# Altium PCB 8CH_RELAY_CARD.PcbDoc
Units mm, origin at the board's own origin, x right, y up, seen from the top; angles counter-clockwise.
Board outline 140 x 72 mm, 2 copper layers (Top Layer, Bottom Layer); 39 components, 52 nets, 134 pads, 0 vias.
Unrouted connection lines stored in the file: 2.
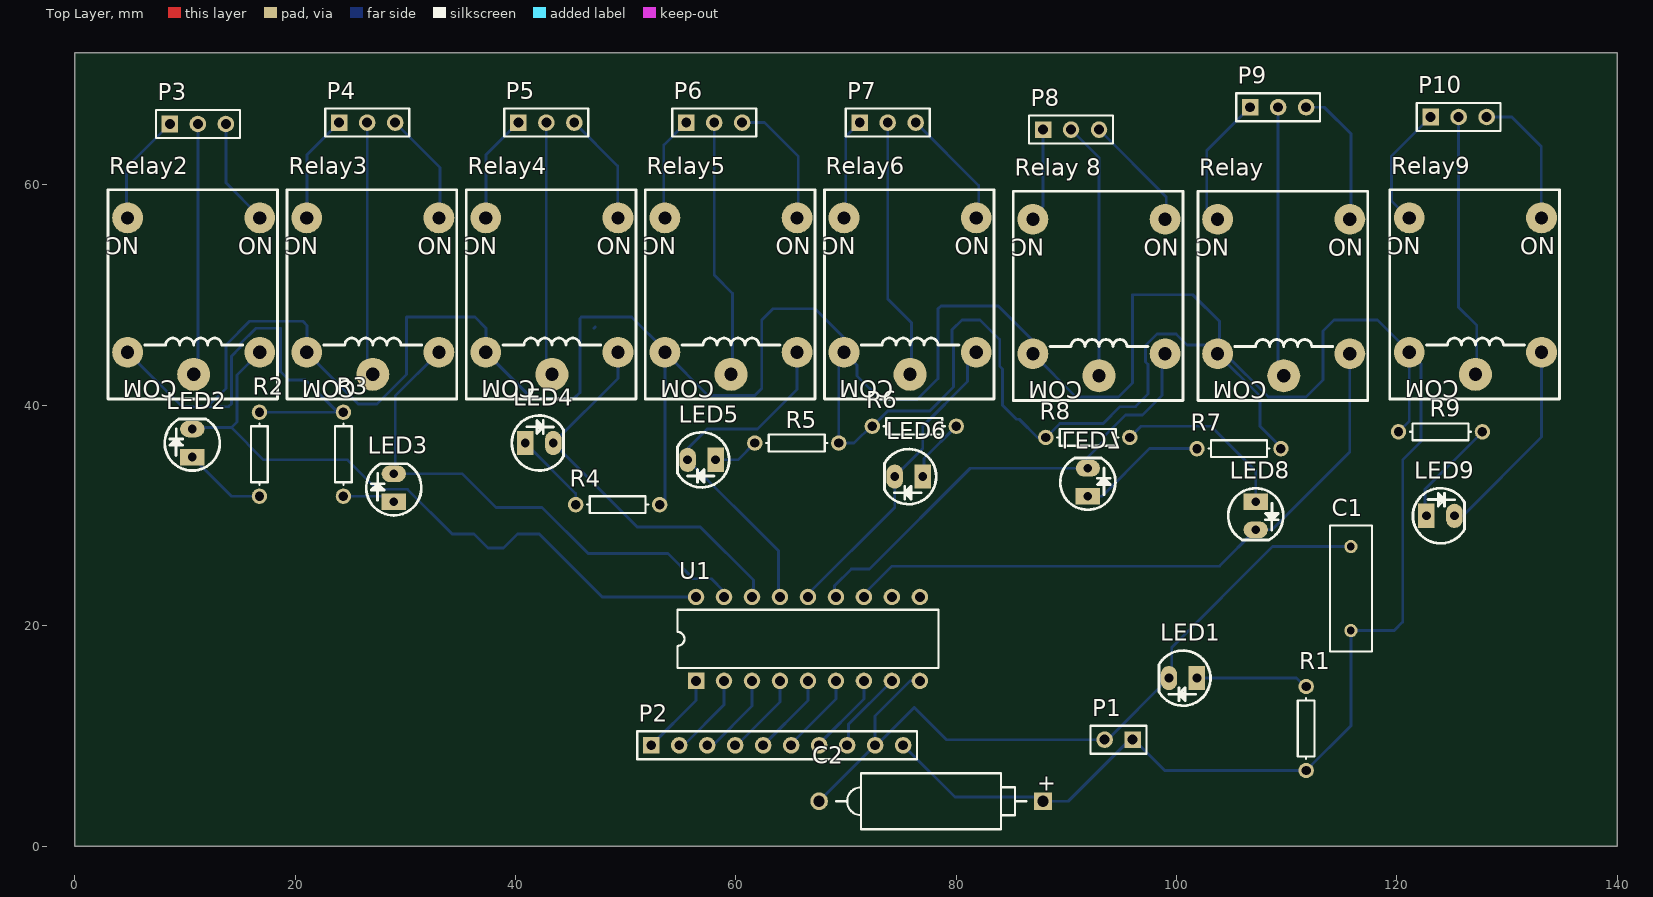
[diagram p0: Top Layer view]
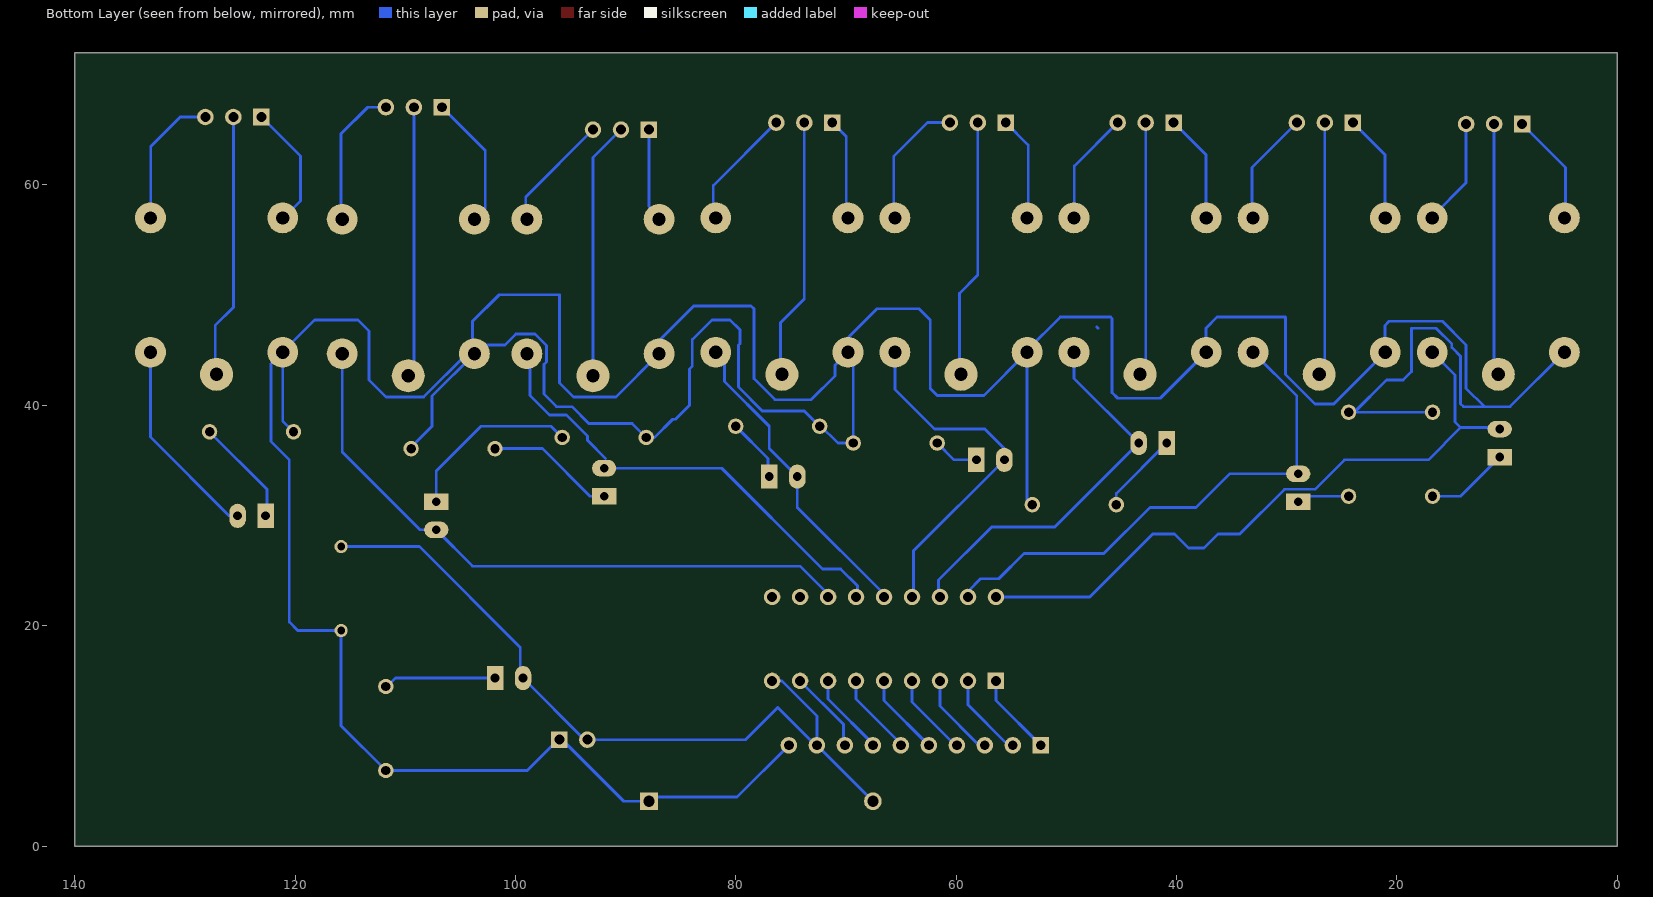
[diagram p1: Bottom Layer view, seen from below]

## Layer stack, top to bottom
Top Layer: signal copper 0.0356
Dielectric: dielectric 0.32, FR-4, Dk 4.8
Bottom Layer: signal copper 0.0356

## Board outline
0,0 140,0 140,72 0,72

## Design rules (kind name [scope] priority, off if disabled: settings)
Clearance [All] p1: gap=0.254
PolygonConnect [All] p1: connectstyle=Relief reliefconductorwidth=0.254 reliefentries=4 polygonreliefangle="90 Angle"
RoutingVias [All] p1: holewidth=0.711 width=1.27 viastyle="Through Hole" minholewidth=0.711 minwidth=1.27 maxholewidth=0.711 maxwidth=1.27
SilkscreenOverComponentPads [All] p1: minsilkscreentomaskgap=0.254
SolderMaskExpansion [All] p1: expansion=0.102
Width [All] p1: maxlimit=2 minlimit=0.254 preferedwidth=0.8
27 further rules are at their usual default settings.

## Components (designator, comment, footprint, x,y, rotation, side; value= is the part's Value field where it differs from the comment)
C1 "Cap" RAD-0.3 115.824,23.368 r270 top
C2 "Cap Pol2" POLAR0.8 77.724,4.064 r0 top
LED1 "LED_THT" 3MM_LED 100.584,15.24 r180 top
LED2 "LED_THT" 3MM_LED 10.668,36.576 r90 top
LED3 "LED_THT" 3MM_LED 28.956,32.512 r90 top
LED4 "LED_THT" 3MM_LED 42.164,36.576 r0 top
LED5 "LED_THT" 3MM_LED 56.896,35.052 r180 top
LED6 "LED_THT" 3MM_LED 75.692,33.528 r180 top
LED7 "LED_THT" 3MM_LED 91.948,33.02 r90 top
LED8 "LED_THT" 3MM_LED 107.188,29.972 r270 top
LED9 "LED_THT" 3MM_LED 123.952,29.972 r0 top
P1 "Header 2" HDR1X2 96.012,9.652 r180 top
P2 "Header 10" HDR1X10 52.324,9.144 r0 top
P3 "Header 4" HDR1X3 8.636,65.532 r0 top
P4 "Header 1" HDR1X3 24.003,65.659 r0 top
P5 "Header 3" HDR1X3 40.259,65.659 r0 top
P6 "Header 3" HDR1X3 55.499,65.659 r0 top
P7 "Header 3" HDR1X3 71.247,65.659 r0 top
P8 "Header 3" HDR1X3 87.884,65.024 r0 top
P9 "Header 3" HDR1X3 106.68,67.056 r0 top
P10 "Header 3" HDR1X3 123.063,66.167 r0 top
R1 "Res1" AXIAL-0.3 111.76,10.668 r270 top
R2 "Res1" AXIAL-0.3 16.764,35.56 r90 top
R3 "Res1" AXIAL-0.3 24.384,35.56 r90 top
R4 "Res1" AXIAL-0.3 49.276,30.988 r0 top
R5 "Res1" AXIAL-0.3 65.532,36.576 r0 top
R6 "Res1" AXIAL-0.3 76.2,38.1 r180 top
R7 "Res1" AXIAL-0.3 105.664,36.068 r0 top
R8 "Res1" AXIAL-0.3 91.948,37.084 r180 top
R9 "Res1" AXIAL-0.3 123.952,37.592 r180 top
Relay "Relay Sugacube" Relay_Sugarcube 109.728,49.784 r180 top
Relay2 "Relay Sugacube" Relay_Sugarcube 10.795,49.911 r180 top
Relay3 "Relay Sugacube1" Relay_Sugarcube 27.051,49.911 r180 top
Relay4 "Relay Sugacube" Relay_Sugarcube 43.307,49.911 r180 top
Relay5 "Relay Sugacube" Relay_Sugarcube 59.563,49.911 r180 top
Relay6 "Relay Sugacube" Relay_Sugarcube 75.819,49.911 r180 top
Relay9 "Relay Sugacube" Relay_Sugarcube 127.127,49.911 r180 top
"Relay 8" "Relay Sugacube" Relay_Sugarcube 92.964,49.784 r180 top
U1 "ULN2803A" A18 66.548,18.796 r0 top

## Footprints (in the part's own frame and the unit in brackets; to place one, negate y for a bottom-side part, rotate by r counter-clockwise, add the part's x,y. Pads: shape width x height; smd on the part's side, far side on the other; paste and mask are expansions set on the pad)
3MM_LED [mm] "3MM_LED"
  rect 1.5x2.2 hole 0.8: 1(-1.27,0)
  oval 1.5x2.2 hole 0.8: 2(1.27,0)
  silkscreen extent -2.5,-2.5 2.19,2.5
A18 [mm] "DIP; 18 Leads; Row Spacing 7.62 mm; Pitch 2.54 mm"
  rect 1.5x1.5 hole 0.9: 1(-10.16,-3.81)
  round 1.5 hole 0.9: 2(-7.62,-3.81) 3(-5.08,-3.81) 4(-2.54,-3.81) 5(0,-3.81) 6(2.54,-3.81) 7(5.08,-3.81) 8(7.62,-3.81) 9(10.16,-3.81) 10(10.16,3.81) 11(7.62,3.81) 12(5.08,3.81) 13(2.54,3.81) 14(0,3.81) 15(-2.54,3.81) 16(-5.08,3.81) 17(-7.62,3.81) 18(-10.16,3.81)
  silkscreen extent -11.85,-2.65 11.85,2.65
AXIAL-0.3 [mm] "Axial Device, Thru-Hole; 2 Leads; 0.3 in Pin Spacing"
  round 1.4 hole 0.85: 1(-3.81,0) 2(3.81,0)
  silkscreen extent -2.77,-0.76 2.77,0.76
HDR1X2 [mm] "Connector; Header; 2 Position"
  rect 1.5x1.5 hole 0.9: 1(0,0)
  round 1.5 hole 0.9: 2(2.54,0)
  silkscreen extent -1.27,-1.27 3.81,1.27
HDR1X3 [mm] "Connector; Header; 3 Position"
  rect 1.5x1.5 hole 0.9: 1(0,0)
  round 1.5 hole 0.9: 2(2.54,0) 3(5.08,0)
  silkscreen extent -1.27,-1.27 6.35,1.27
HDR1X10 [mm] "Connector; Header; 10 Position"
  rect 1.5x1.5 hole 0.9: 1(0,0)
  round 1.5 hole 0.9: 2(2.54,0) 3(5.08,0) 4(7.62,0) 5(10.16,0) 6(12.7,0) 7(15.24,0) 8(17.78,0) 9(20.32,0) 10(22.86,0)
  silkscreen extent -1.27,-1.27 24.13,1.27
POLAR0.8 [mm] "Polarized Capacitor (Axial); 2 Leads"
  rect 1.6x1.6 hole 1: 1(10.16,0)
  round 1.6 hole 1: 2(-10.16,0)
  silkscreen extent -8.64,-2.54 8.64,2.54
RAD-0.3 [mm] "Radial Cap, Thru-Hole; 2 Leads; 0.3 in Pin Spacing"
  round 1.2 hole 0.7: 1(-3.81,0) 2(3.81,0)
  silkscreen extent -5.71,-1.91 5.71,1.91
Relay_Sugarcube [mm] "Relay_Sugarcube"
  round 3 hole 1.2: 1(0,7.1)
  round 2.8 hole 1.2: 2(6,-7.1) 3(-6,-7.1) 4(6,5.1) 5(-6,5.1)
  silkscreen extent -7.62,-9.65 7.78,9.35

## Part data
C1: "Capacitor"
C2: "Polarized Capacitor (Axial)"
P1: "Header, 2-Pin"
P2: "Header, 10-Pin"
P3 P4: library part "Header 3", "Header, 3-Pin"
P5 P6 P7 P8 P9 P10: "Header, 3-Pin"
R1 R2 R3 R4 R5 R6 R7 R8 R9: "Resistor"
Relay3: library part "Relay Sugacube", "Relay Sugacube"
U1: "High-Voltage, High-Current Darlington Array"

## Nets (pads, with @x,y where several pads share a name; then routed paths per layer and width w, separated by ;. In a path a pad name is that pad's centre, name@x,y a point inside that pad or via, vN(x,y) a via of type N, cw(c..) or ccw(c..) an arc to the next point about the centre after c; other vN are vias at no path point)
GND: C1.1 C2.2 LED1.2 P1.2 P2.9 U1.9 | length 68.7
  Bottom Layer w0.254: C2.2 P2.9@72.517,9.017 ; P2.9@72.644,9.271 72.644,11.811 75.819,14.986 U1.9 ; P2.9@72.771,9.144 76.2,12.573 79.121,9.652 P1.2 ; P1.2@93.726,9.652 LED1.2 ; LED1.2@99.568,15.494 99.568,18.034 108.712,27.178 C1.1
NetLED1_1: LED1.1 R1.1 | length 10.3
  Bottom Layer w0.254: LED1.1 110.871,15.24 R1.1@111.76,14.351
NetLED2_1: LED2.1 R2.1 | length 7.6
  Bottom Layer w0.254: LED2.1 14.224,31.75 R2.1
NetLED3_1: LED3.1 R3.1 | length 4.2
  Bottom Layer w0.254: R3.1 LED3.1@28.575,31.75
NetLED4_1: LED4.1 R4.1 | length 7.5
  Bottom Layer w0.254: LED4.1 45.466,32.004 R4.1
NetLED5_1: LED5.1 R5.1 | length 4.2
  Bottom Layer w0.254: LED5.1 60.198,35.052 R5.1
NetLED6_1: LED6.1 R6.1 | length 5.7
  Bottom Layer w0.254: LED6.1@77.089,33.655 77.089,35.179 R6.1
NetLED7_1: LED7.1 R7.1 | length 11.6
  Bottom Layer w0.254: LED7.1@92.075,31.75 93.218,31.75 97.536,36.068 R7.1
NetLED8_1: LED8.1 R8.1 | length 16.2
  Bottom Layer w0.254: R8.1 96.774,38.1 103.124,38.1 107.188,34.036 LED8.1@107.188,31.369
NetLED9_1: LED9.1 R9.1 | length 9.8
  Bottom Layer w0.254: LED9.1@122.555,29.972 122.555,32.385 R9.1
NetP2_1: P2.1 U1.1 | length 7.5
  Bottom Layer w0.254: P2.1 56.388,13.208 U1.1
NetP2_2: P2.2 U1.2 | length 7.6
  Bottom Layer w0.254: P2.2@54.991,9.271 55.372,9.271 58.928,12.827 U1.2
NetP2_3: P2.3 U1.3 | length 7.3
  Bottom Layer w0.254: P2.3@57.912,9.144 61.468,12.7 U1.3
NetP2_4: P2.4 U1.4 | length 7.3
  Bottom Layer w0.254: P2.4@60.198,9.271 64.008,13.081 U1.4
NetP2_5: P2.5 U1.5 | length 7.5
  Bottom Layer w0.254: P2.5 66.548,13.208 U1.5
NetP2_6: P2.6 U1.6 | length 7.4
  Bottom Layer w0.254: P2.6@65.024,9.271 69.088,13.335 U1.6
NetP2_7: P2.7 U1.7 | length 7.6
  Bottom Layer w0.254: P2.7@67.437,9.144 71.628,13.335 U1.7
NetP2_8: P2.8 U1.8 | length 7.5
  Bottom Layer w0.254: P2.8@70.231,9.144 70.231,11.049 U1.8
NetP3_1: P3.1 Relay2.2 | length 10
  Bottom Layer w0.254: Relay2.2@4.699,57.15 4.699,61.595 P3.1
NetP3_2: P3.2 Relay2.1 | length 22.2
  Bottom Layer w0.254: Relay2.1@11.176,43.307 P3.2
NetP3_3: P3.3 Relay2.3 | length 9.6
  Bottom Layer w0.254: P3.3 13.716,60.198 Relay2.3@16.764,57.15
NetP4_1: P4.1 Relay3.2 | length 9.7
  Bottom Layer w0.254: Relay3.2@21.082,57.15 21.082,62.738 P4.1
NetP4_2: P4.2 Relay3.1 | length 22.9
  Bottom Layer w0.254: P4.2 26.543,43.307 Relay3.1@26.924,42.926
NetP4_3: P4.3 Relay3.3 | length 10.3
  Bottom Layer w0.254: P4.3 33.147,61.595 Relay3.3@33.147,57.023
NetP5_1: P5.1 Relay4.2 | length 9.7
  Bottom Layer w0.254: Relay4.2@37.338,57.15 37.338,62.738 P5.1
NetP5_2: P5.2 Relay4.1 | length 22.5
  Bottom Layer w0.254: Relay4.1@42.799,43.18 P5.2
NetP5_3: P5.3 Relay4.3 | length 10.3
  Bottom Layer w0.254: P5.3 49.276,61.722 Relay4.3@49.276,57.023
NetP6_1: P6.1 Relay5.2 | length 9.5
  Bottom Layer w0.254: Relay5.2@53.467,57.023 53.467,63.627 P6.1
NetP6_2: P6.2 Relay5.1 | length 23.4
  Bottom Layer w0.254: P6.2 58.039,51.816 59.69,50.165 Relay5.1@59.69,42.926
NetP6_3: P6.3 Relay5.3 | length 11.8
  Bottom Layer w0.254: P6.3 62.611,65.659 65.659,62.611 Relay5.3@65.659,57.15
NetP7_1: P7.1 Relay6.2 | length 9
  Bottom Layer w0.254: Relay6.2@69.977,57.15 69.977,64.389 P7.1
NetP7_2: P7.2 Relay6.1 | length 23.8
  Bottom Layer w0.254: P7.2 73.787,49.657 75.946,47.498 Relay6.1@75.946,42.799
NetP7_3: P7.3 Relay6.3 | length 10.9
  Bottom Layer w0.254: P7.3 82.042,59.944 Relay6.3@82.042,57.15
NetP8_1: "Relay 8.2" P8.1 | length 8.4
  Bottom Layer w0.254: 86.868,57.023 87.884,58.039 P8.1
NetP8_2: "Relay 8.1" P8.2 | length 23.4
  Bottom Layer w0.254: P8.2 92.964,62.484 92.964,42.684 92.964,42.672
NetP8_3: "Relay 8.3" P8.3 | length 10.7
  Bottom Layer w0.254: P8.3 99.06,58.928 99.06,56.896
NetP9_1: P9.1 Relay.2 | length 12.2
  Bottom Layer w0.254: Relay.2@103.632,56.896 102.743,57.785 102.743,63.119 P9.1
NetP9_2: P9.2 Relay.1 | length 24.5
  Bottom Layer w0.254: P9.2 109.22,43.307 Relay.1@109.728,42.799
NetP9_3: P9.3 Relay.3 | length 12.9
  Bottom Layer w0.254: P9.3 113.411,67.056 115.824,64.643 Relay.3@115.824,56.769
NetP10_1: P10.1 Relay9.2 | length 11.4
  Bottom Layer w0.254: Relay9.2@121.158,56.896 119.507,58.547 119.507,62.611 P10.1
NetP10_2: P10.2 Relay9.1 | length 24.1
  Bottom Layer w0.254: P10.2 125.603,48.895 127.254,47.244 Relay9.1@127.254,42.799
NetP10_3: P10.3 Relay9.3 | length 12.4
  Bottom Layer w0.254: P10.3 130.429,66.167 133.096,63.5 Relay9.3@133.096,57.15
OP1: LED2.2 Relay2.5 U1.18 | length 61.9
  Bottom Layer w0.254: LED2.2@10.668,37.973 14.224,37.973 ; Relay2.5@16.795,43.846 Relay2.5 14.732,42.748 14.732,38.481 14.224,37.973 ; U1.18@56.261,22.606 47.879,22.606 42.164,28.321 40.189,28.321 38.919,27.051 37.51,27.051 36.24,28.321 34.266,28.321 30.214,32.373 27.444,32.373 24.765,35.052 17.145,35.052 14.224,37.973
OP2: LED3.2 Relay3.5 U1.17 | length 47.3
  Bottom Layer w0.254: LED3.2 35.179,33.782 38.227,30.734 42.418,30.734 46.609,26.543 53.848,26.543 56.134,24.257 57.785,24.257 58.928,23.114 U1.17@58.928,22.733 ; LED3.2@29.083,33.909 29.083,40.843 Relay3.5
OP3: LED4.2 Relay4.5 U1.16 | length 35.5
  Bottom Layer w0.254: Relay4.5 49.307,42.449 LED4.2 51.054,28.956 56.769,28.956 61.595,24.13 U1.16@61.595,22.606
OP4: LED5.2 Relay5.5 U1.15 | length 32.6
  Bottom Layer w0.254: LED5.2@55.499,35.052 55.499,35.941 57.404,37.846 61.976,37.846 65.563,41.433 Relay5.5 ; LED5.2 63.881,26.797 U1.15@63.881,22.479
OP5: LED6.2 Relay6.5 U1.14 | length 28.5
  Bottom Layer w0.254: U1.14@66.421,22.733 74.422,30.734 LED6.2 76.962,36.068 76.962,38.1 81.026,42.164 81.026,44.018 Relay6.5
OP6: "Relay 8.5" LED7.2 U1.13 | length 41.8
  Bottom Layer w0.254: U1.13@68.961,22.606 68.961,23.622 70.485,25.146 72.136,25.146 81.28,34.29 LED7.2 ; 91.821,35.179 93.472,36.83 93.472,37.211 95.377,39.116 96.901,39.116 98.679,40.894 98.679,44.399 98.964,44.684
OP7: LED8.2 Relay.5 U1.12 | length 58.6
  Bottom Layer w0.254: U1.12 71.628,22.86 74.168,25.4 103.886,25.4 LED8.2 108.647,28.702 115.728,35.783 Relay.5
OP8: U1.11
OP9: LED9.2 Relay9.5 | length 18.6
  Bottom Layer w0.254: LED9.2 125.984,29.972 133.127,37.115 Relay9.5
VCC: "Relay 8.4" C1.2 C2.1 P1.1 P2.10 R1.2 R2.2 R3.2 R4.2 R5.2 R6.2 R7.2 R8.2 R9.2 Relay2.4 Relay3.4 Relay4.4 Relay5.4 Relay6.4 Relay9.4 Relay.4 | length 406.4
  Bottom Layer w0.254: Relay2.4 9.728,39.878 12.065,39.878 13.716,41.529 13.716,45.466 15.875,47.625 20.701,47.625 21.082,47.244 Relay3.4@21.082,44.958 ; 12.192,39.878 13.97,39.878 14.224,40.132 14.224,44.45 15.014,45.24 15.014,45.549 16.455,46.99 18.669,46.99 18.669,43.053 19.431,42.291 20.955,42.291 23.876,39.37 R2.2 ; Relay3.4 25.73,40.132 27.432,40.132 30.099,42.799 30.099,48.006 36.322,48.006 37.338,46.99 Relay4.4@37.338,44.831 ; Relay4.4 41.478,40.64 45.339,40.64 45.847,41.148 45.847,47.879 ; 45.974,48.006 50.546,48.006 Relay5.4@53.594,44.958 ; 47.117,46.99 47.244,47.117 ; R4.2 53.563,31.465 Relay5.4 57.48,40.894 61.722,40.894 62.357,41.529 62.357,47.752 63.373,48.768 67.183,48.768 69.723,46.228 Relay6.4@69.723,44.831 ; Relay6.4@69.342,44.069 R5.2 70.739,36.576 R6.2@72.39,38.227 ; Relay6.4 70.993,43.637 70.993,42.672 73.152,40.513 76.454,40.513 78.359,42.418 78.359,48.768 78.613,49.022 83.82,49.022 87.122,45.72 87.122,44.831 ; R6.2 73.787,39.497 77.597,39.497 79.756,41.656 79.756,45.466 79.629,45.593 79.629,46.863 80.518,47.752 82.169,47.752 83.947,45.974 83.947,43.561 84.201,43.307 84.201,40.005 85.471,38.735 85.725,38.735 87.376,37.084 R8.2@88.011,37.084 ; P2.10 79.883,4.445 C2.1@87.503,4.445 ; 86.964,43.719 86.964,44.684 90.881,40.767 94.742,40.767 96.012,42.037 96.012,50.038 101.473,50.038 103.886,47.625 Relay.4@103.886,44.684 ; C2.1 90.17,4.064 P1.1@95.758,9.652 ; R8.2 89.408,38.354 93.345,38.354 94.869,39.878 96.266,39.878 97.409,41.021 97.409,43.72 97.183,43.946 97.183,45.422 98.226,46.465 99.966,46.465 100.965,45.466 Relay.4@102.87,45.466 ; P1.1@96.139,9.652 98.933,6.858 R1.2 ; Relay.4@103.886,44.577 Relay.4@103.886,44.684 ; R7.2@109.474,36.195 107.569,38.1 107.569,40.843 Relay.4 Relay.4@103.886,44.684 ; R1.2@111.633,6.731 R1.2 ; R9.2 121.127,38.577 Relay9.4 122.174,43.764 122.174,36.703 120.523,35.052 120.523,20.32 119.761,19.558 C1.2 115.824,10.922 R1.2 ; Relay9.4@121.158,44.831 118.237,47.752 114.3,47.752 113.284,46.736 113.284,42.291 111.76,40.767 108.331,40.767 104.414,44.684 Relay.4@103.886,44.684
pads on no net: U1.10

## Silkscreen, mask and mechanical layers (free items; w line width, h text height)
Mechanical 1:
  the board outline again, w0.254

## Text inside footprints (layer, text, board x,y; h text height)
C2: Top Overlay "+" at 87.376,5.014 h1.5
Relay: Top Overlay "NO" at 116.967,55.118 h1.52 r180; Top Overlay "NC" at 104.775,55.118 h1.52 r180; Top Overlay "COM" at 108.204,42.164 h1.52 r180
Relay2: Top Overlay "NO" at 18.034,55.245 h1.52 r180; Top Overlay "NC" at 5.842,55.245 h1.52 r180; Top Overlay "COM" at 9.271,42.291 h1.52 r180
Relay3: Top Overlay "NO" at 34.29,55.245 h1.52 r180; Top Overlay "NC" at 22.098,55.245 h1.52 r180; Top Overlay "COM" at 25.527,42.291 h1.52 r180
Relay4: Top Overlay "NO" at 50.546,55.245 h1.52 r180; Top Overlay "NC" at 38.354,55.245 h1.52 r180; Top Overlay "COM" at 41.783,42.291 h1.52 r180
Relay5: Top Overlay "NO" at 66.802,55.245 h1.52 r180; Top Overlay "NC" at 54.61,55.245 h1.52 r180; Top Overlay "COM" at 58.039,42.291 h1.52 r180
Relay6: Top Overlay "NO" at 83.058,55.245 h1.52 r180; Top Overlay "NC" at 70.866,55.245 h1.52 r180; Top Overlay "COM" at 74.295,42.291 h1.52 r180
Relay9: Top Overlay "NO" at 134.366,55.245 h1.52 r180; Top Overlay "NC" at 122.174,55.245 h1.52 r180; Top Overlay "COM" at 125.603,42.291 h1.52 r180
"Relay 8": Top Overlay "NO" at 100.203,55.118 h1.52 r180; Top Overlay "NC" at 88.011,55.118 h1.52 r180; Top Overlay "COM" at 91.44,42.164 h1.52 r180